# EAGLE board XuLA2-array (EAGLE 5.11), part 1 of 6
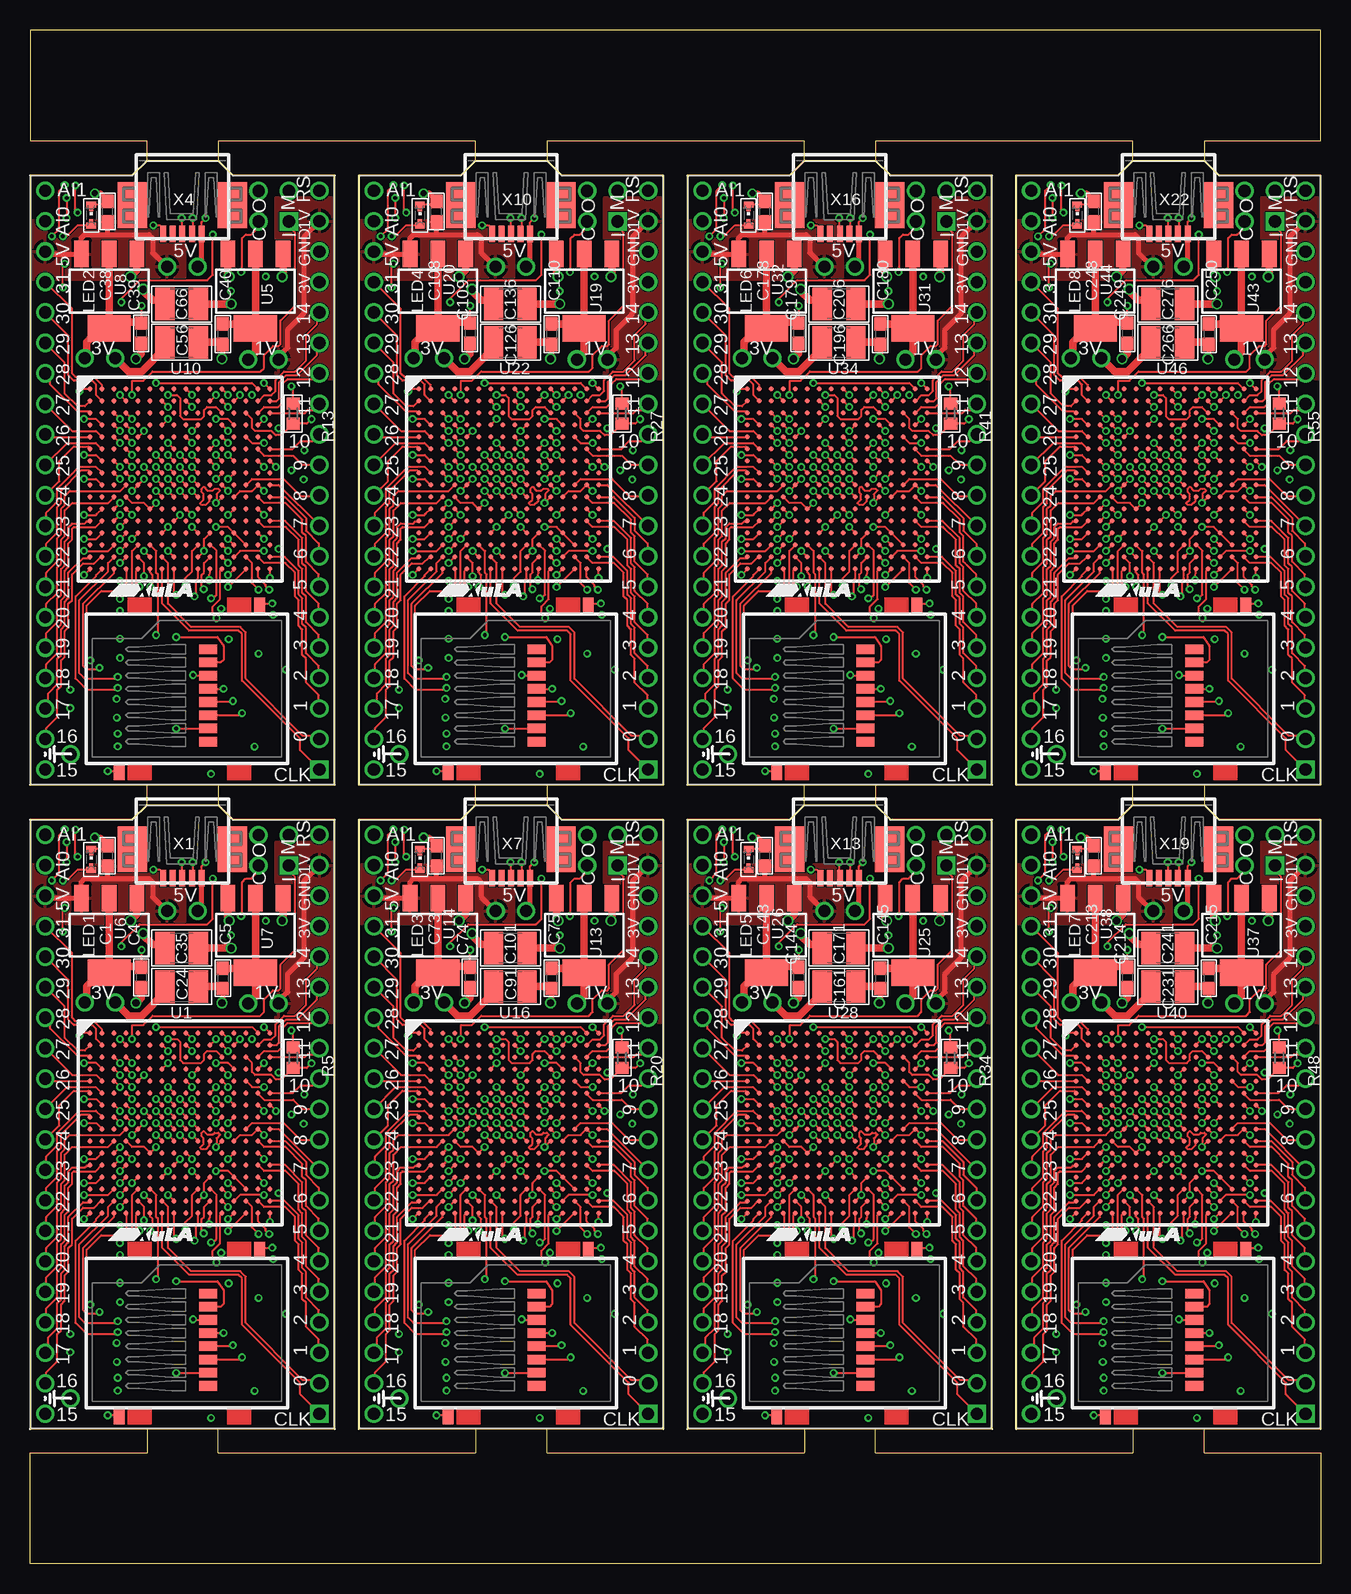
[diagram p0: board, top side]
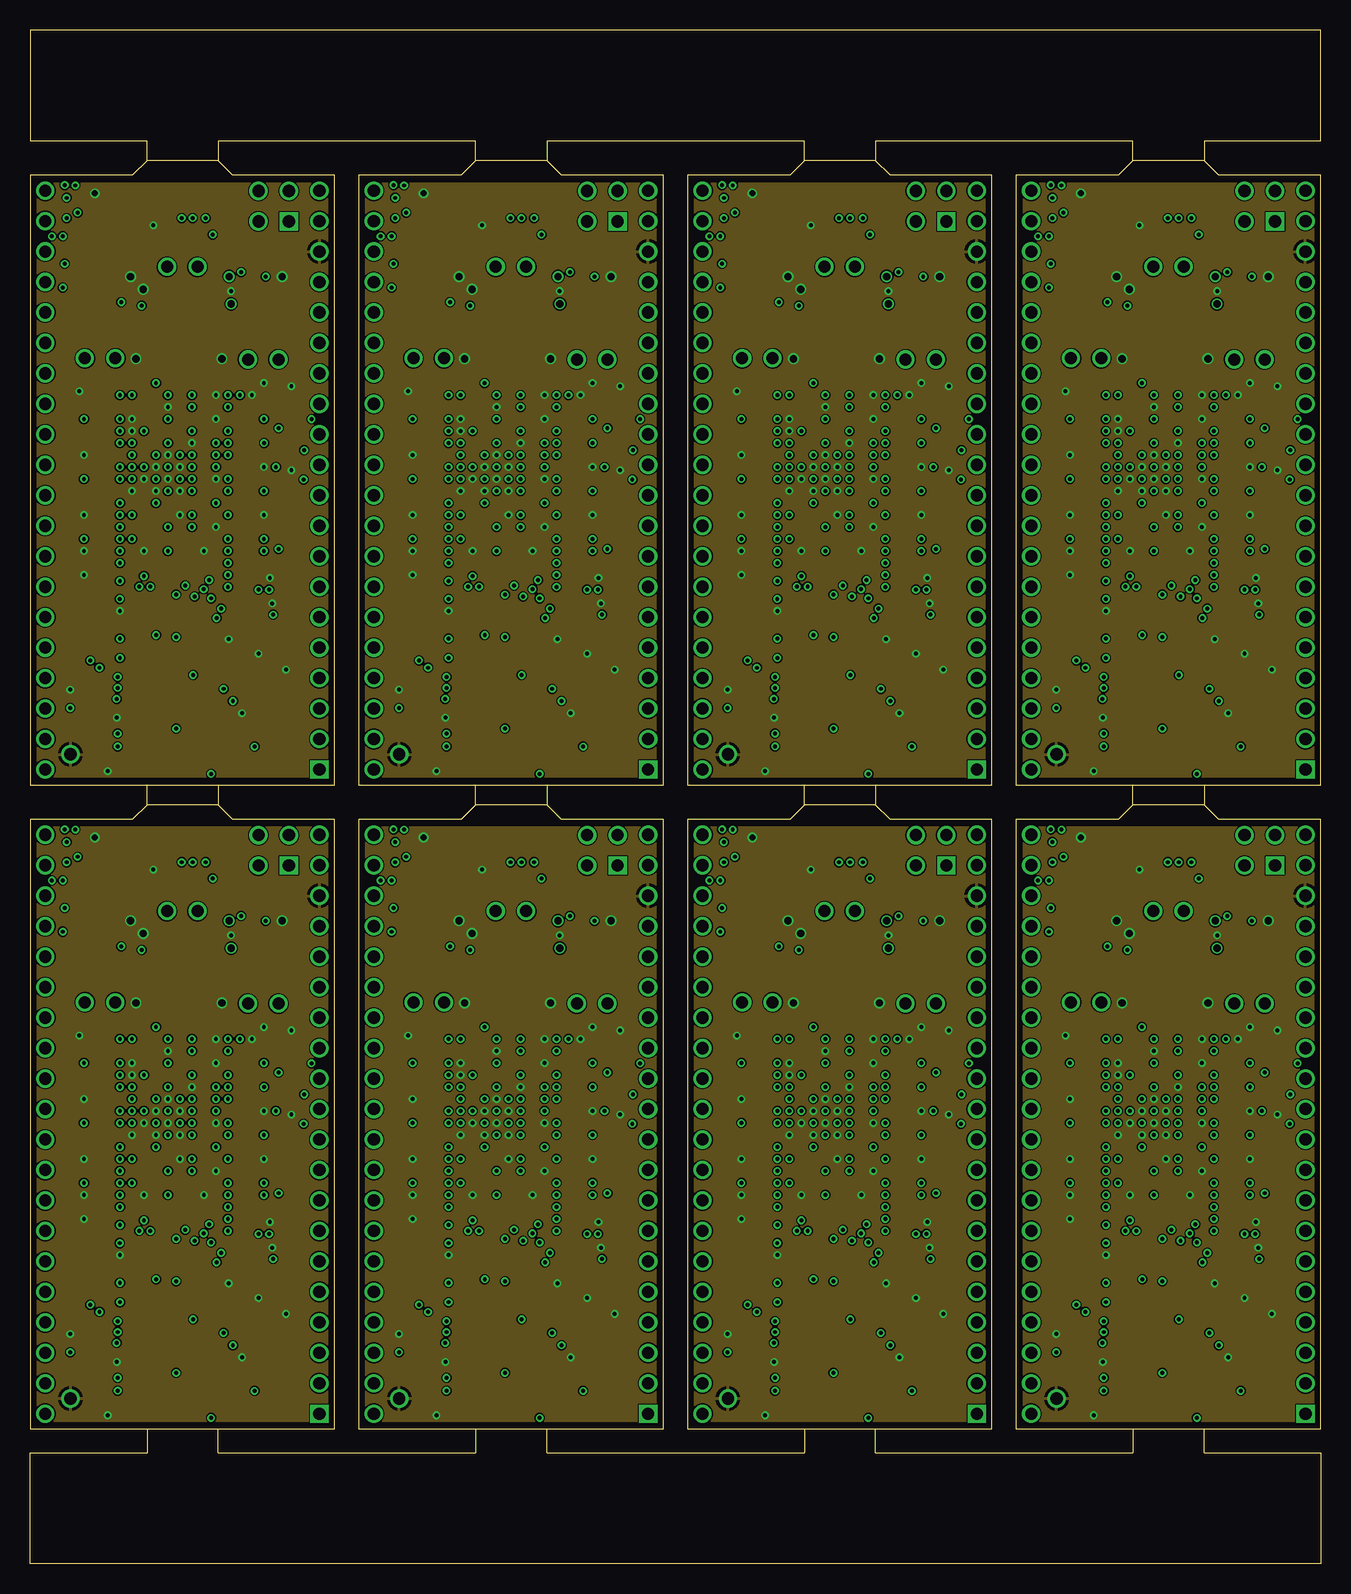
[diagram p1: board, inner layer Route2]
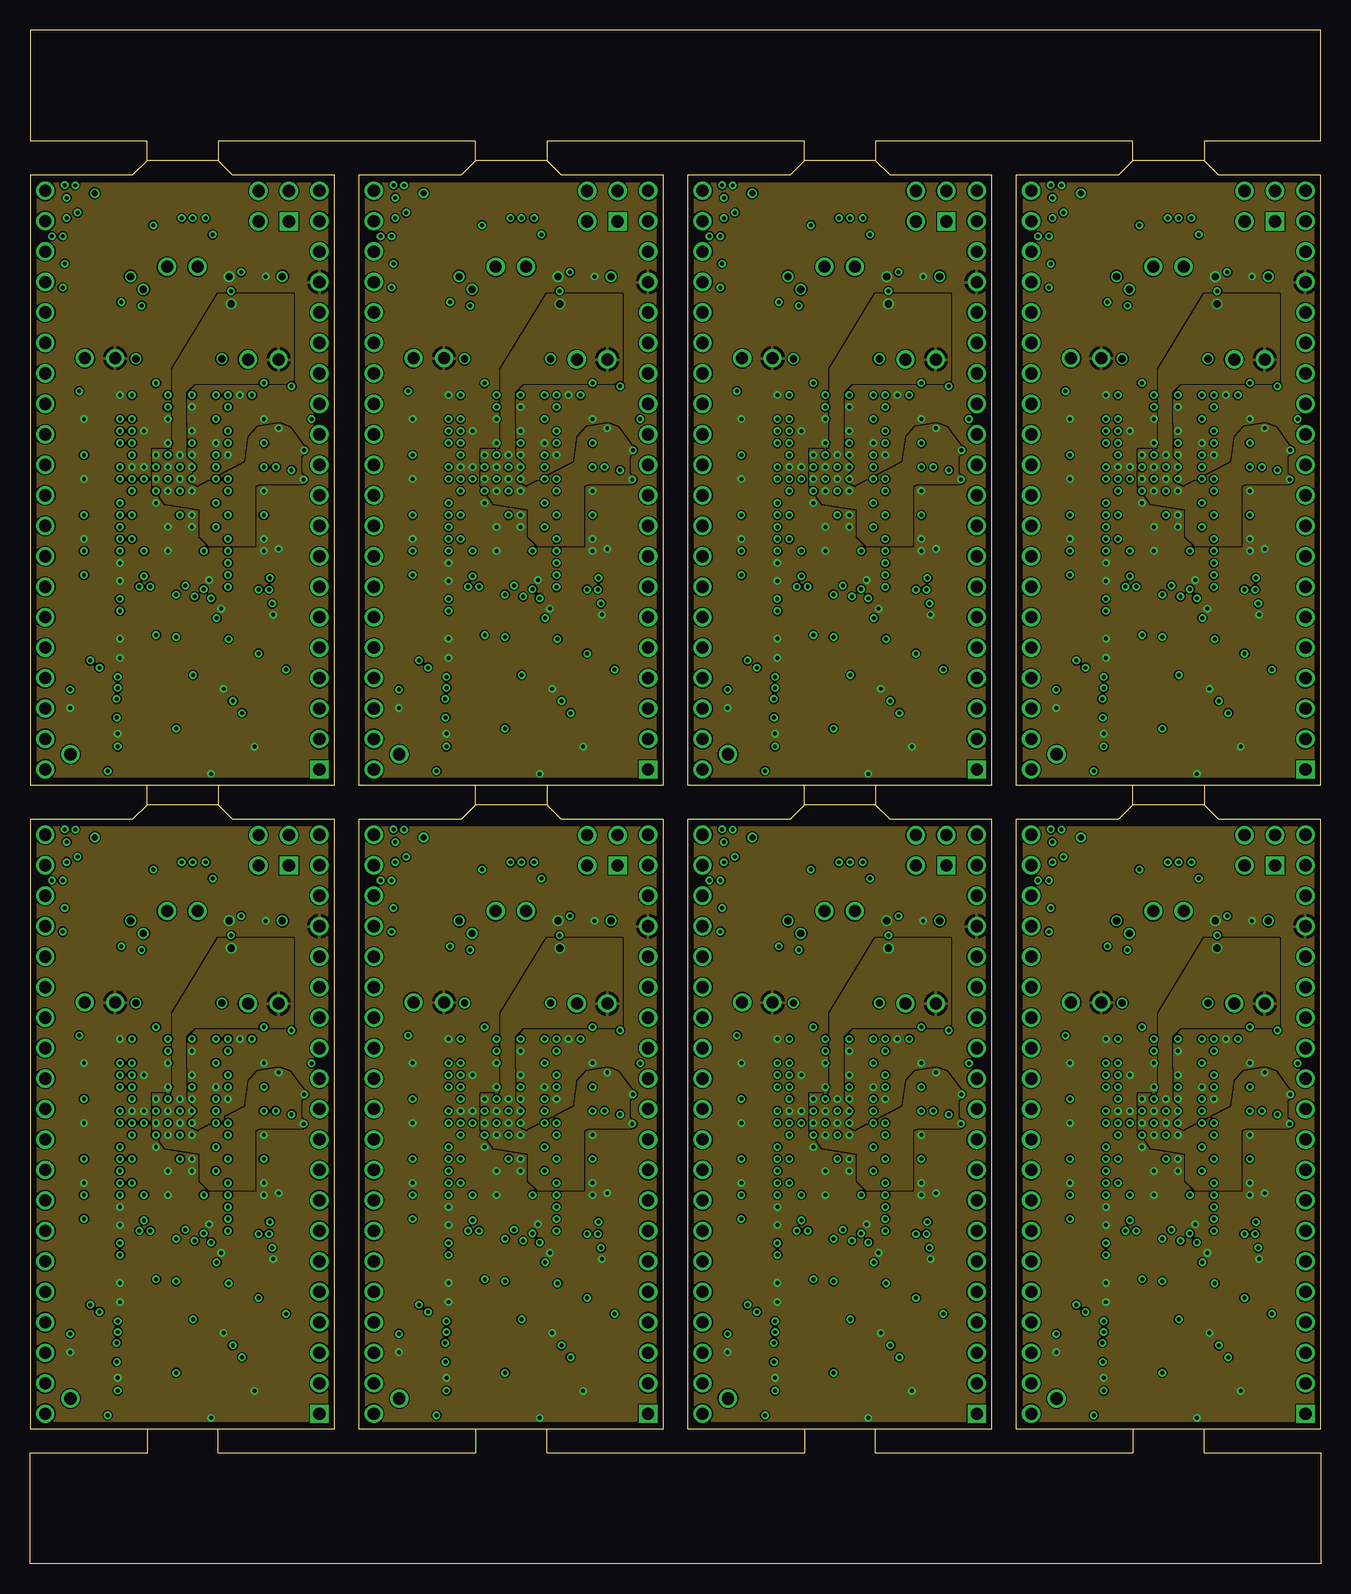
[diagram p2: board, inner layer Route3]
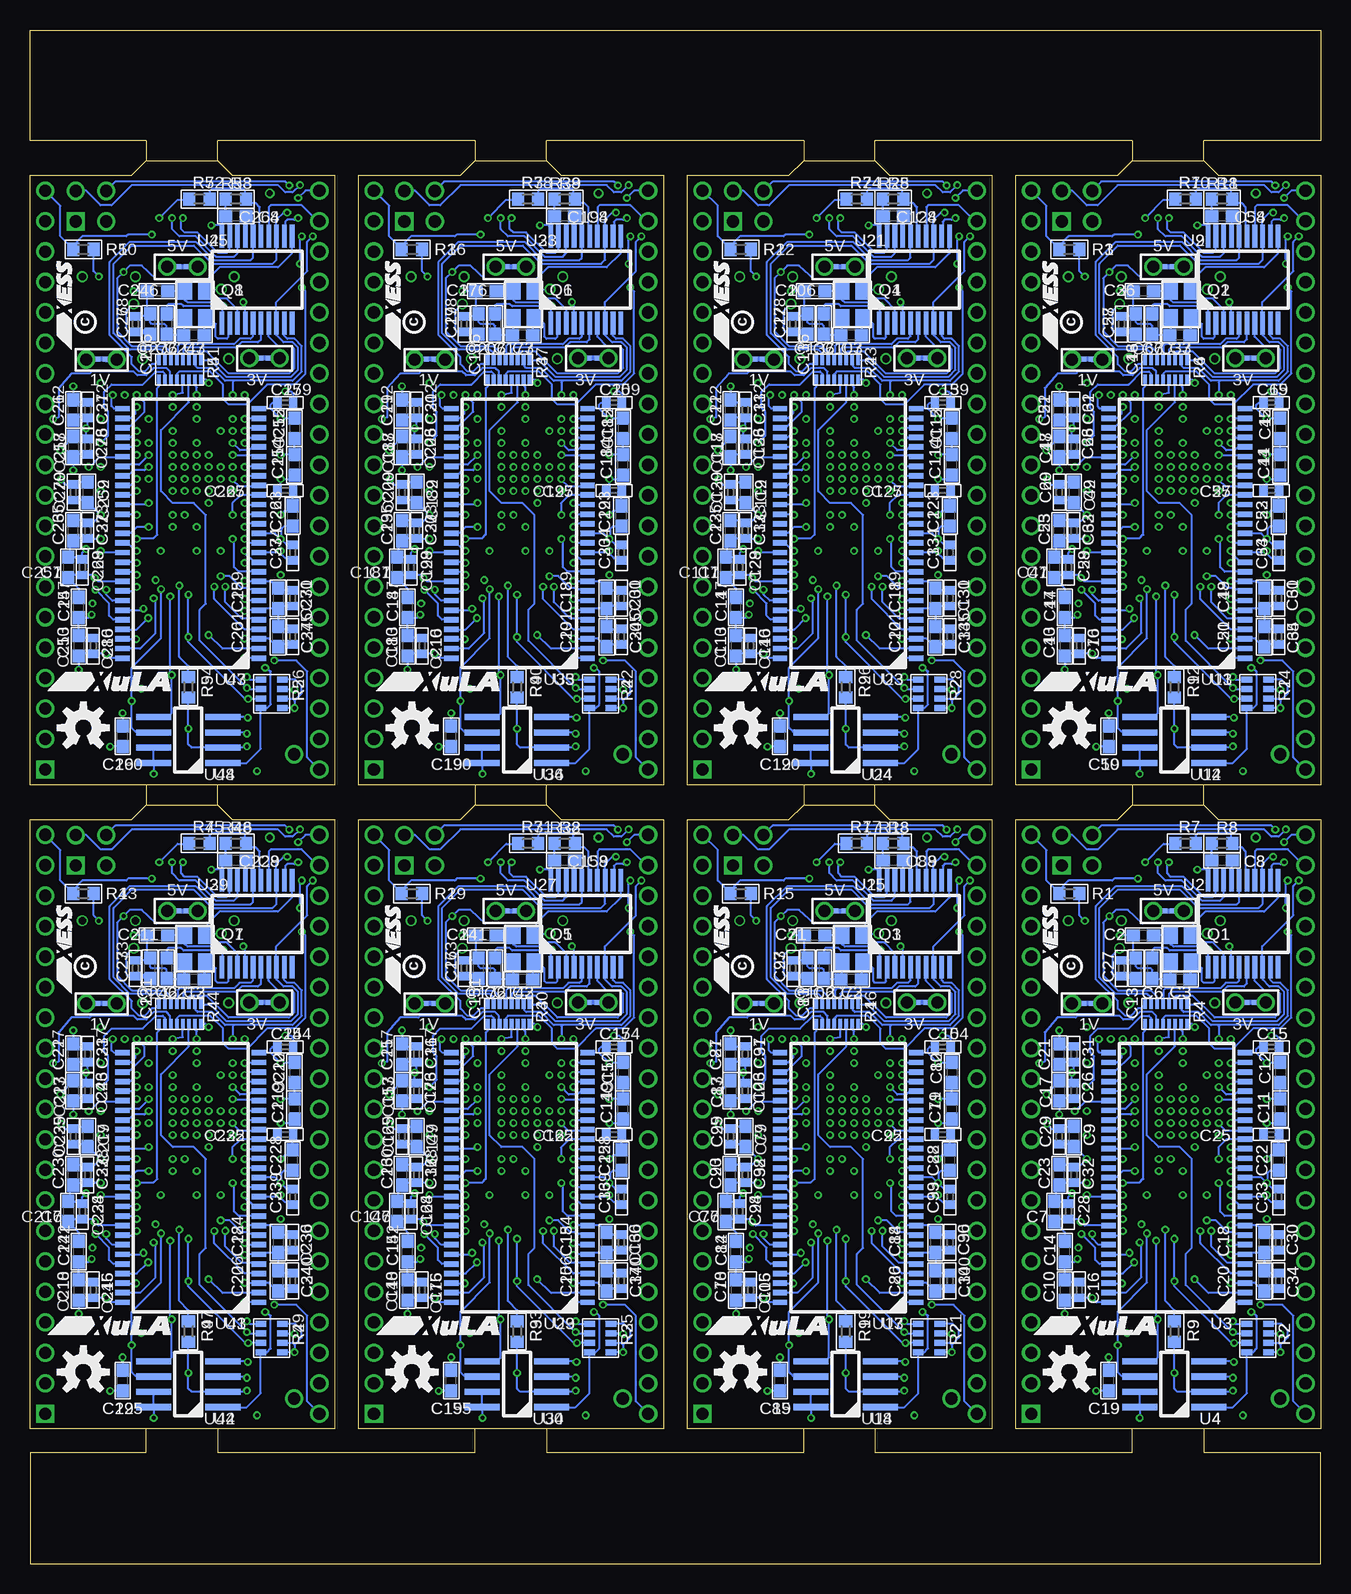
[diagram p3: board, bottom side, seen from below]

Size 107.6 x 127.84 mm. Coordinates in mm from the lower left corner, seen from the top.
Outline: 9.75,11.22 0,11.22 0,62.02 8.53,62.02 9.75,63.24
Outline: 9.75,11.22 15.7,11.22
Outline: 15.7,11.22 25.4,11.22 25.4,62.02 16.92,62.02 15.7,63.24
Outline: 15.7,63.24 9.75,63.24
Outline: 9.75,63.24 9.75,64.92
Outline: 15.7,64.92 15.7,63.24
Outline: 9.75,64.92 0,64.92 0,115.72 8.53,115.72 9.75,116.94
Outline: 9.75,64.92 15.7,64.92
Outline: 15.7,64.92 25.4,64.92 25.4,115.72 16.92,115.72 15.7,116.94
Outline: 15.7,116.94 9.75,116.94
Outline: 9.75,116.94 9.75,118.62 0,118.62 0,127.84 107.6,127.84 107.6,118.62 97.9,118.62 97.9,116.94
Outline: 15.7,116.94 15.7,118.62 37.15,118.62 37.15,116.94
Outline: 9.75,11.22 9.75,9.22 0,9.22 0,0 107.6,0 107.6,9.22 97.9,9.22 97.9,11.22
Outline: 15.7,11.22 15.7,9.22 37.15,9.22 37.15,11.22
Outline: 37.15,11.22 27.4,11.22 27.4,62.02 35.93,62.02 37.15,63.24
Outline: 37.15,11.22 43.1,11.22
Outline: 43.1,11.22 52.8,11.22 52.8,62.02 44.32,62.02 43.1,63.24
Outline: 43.1,63.24 37.15,63.24
Outline: 37.15,63.24 37.15,64.92
Outline: 43.1,64.92 43.1,63.24
Outline: 37.15,64.92 27.4,64.92 27.4,115.72 35.93,115.72 37.15,116.94
Outline: 37.15,64.92 43.1,64.92
Outline: 43.1,64.92 52.8,64.92 52.8,115.72 44.32,115.72 43.1,116.94
Outline: 43.1,116.94 37.15,116.94
Outline: 43.1,116.94 43.1,118.62 64.55,118.62 64.55,116.94
Outline: 43.1,11.22 43.1,9.22 64.55,9.22 64.55,11.22
Outline: 64.55,11.22 54.8,11.22 54.8,62.02 63.33,62.02 64.55,63.24
Outline: 64.55,11.22 70.5,11.22
Outline: 70.5,11.22 80.2,11.22 80.2,62.02 71.72,62.02 70.5,63.24
Outline: 70.5,63.24 64.55,63.24
Outline: 64.55,63.24 64.55,64.92
Outline: 70.5,64.92 70.5,63.24
Outline: 64.55,64.92 54.8,64.92 54.8,115.72 63.33,115.72 64.55,116.94
Outline: 64.55,64.92 70.5,64.92
Outline: 70.5,64.92 80.2,64.92 80.2,115.72 71.72,115.72 70.5,116.94
Outline: 70.5,116.94 64.55,116.94
Outline: 70.5,116.94 70.5,118.62 91.95,118.62 91.95,116.94
Outline: 70.5,11.22 70.5,9.22 91.95,9.22 91.95,11.22
Outline: 91.95,11.22 82.2,11.22 82.2,62.02 90.73,62.02 91.95,63.24
Outline: 91.95,11.22 97.9,11.22
Outline: 97.9,11.22 107.6,11.22 107.6,62.02 99.12,62.02 97.9,63.24
Outline: 97.9,63.24 91.95,63.24
Outline: 91.95,63.24 91.95,64.92
Outline: 97.9,64.92 97.9,63.24
Outline: 91.95,64.92 82.2,64.92 82.2,115.72 90.73,115.72 91.95,116.94
Outline: 91.95,64.92 97.9,64.92
Outline: 97.9,64.92 107.6,64.92 107.6,115.72 99.12,115.72 97.9,116.94
Outline: 97.9,116.94 91.95,116.94
Copper layers (1*2*3*16): Top 0.035mm / dielectric 0.126mm / Route2 0.035mm / dielectric 1.626mm / Route3 0.035mm / dielectric 0.126mm / Bottom 0.035mm
Design rules "SEP_4layer *": minimum track width 5mil, minimum drill 10mil, track to track 0.1mm, track to pad 0.1295mm, pad to pad 0.1mm, via to via 0.1mm, smd to smd 0.1mm, copper to edge 0.15mm, drill to drill 0.2mm, minimum pad ring 10mil, minimum via ring 6mil, stop-mask expansion 2mil, vias tented up to drill 0.6071mm, thermal gap 10mil
Net classes: 1 power: clearance 0.254 mm

## Footprints (pad centres in the part's own frame; a part is rotated, then mirrored left to right if it is on the bottom)
JP1-NOSILK = drill 1 round: 1 0,-1.27; 2 0,1.27
C0603 = smd 1.1 x 1: 1 -0.85,0; 2 0.85,0
C0402 = smd 0.7 x 0.9: 1 -0.65,0; 2 0.65,0
C1210 = smd 1.6 x 2.7: 1 -1.4,0; 2 1.4,0
TP-MINI = drill 1.016 round: 1 0,0
2X02-NOSILK = drill 1.016 square: 1 -1.27,-1.27 | drill 1.016 round: 2 -1.27,1.27; 3 1.27,-1.27; 4 1.27,1.27
CHIPLED-0603-TTW = smd 0.8 x 0.5: A 0,-0.875; C 0,0.875 | smd 0.35 x 0.35: A@1 0,-0.5; C@1 0,0.5
32X25 = smd 1.2 x 1.4: 1 0,0; 2 0,-2.2; 3 1.7,-2.2; 4 1.7,0
R0603 = smd 1 x 1.1: 1 -0.85,0; 2 0.85,0
742C083 = smd 0.5 x 0.9: 1 -0.4,-0.9; 2 0.4,-0.9; 3 1.2,-0.9; 4 2,-0.9; 5 2,0.9; 6 1.2,0.9; 7 0.4,0.9; 8 -0.4,0.9
741X163 = smd 0.3 x 0.8: 1 -1.75,-0.8; 2 -1.25,-0.8; 3 -0.75,-0.8; 4 -0.25,-0.8; 5 0.25,-0.8; 6 0.75,-0.8; 7 1.25,-0.8; 8 1.75,-0.8; 9 1.75,0.8; 10 1.25,0.8; 11 0.75,0.8; 12 0.25,0.8; 13 -0.25,0.8; 14 -0.75,0.8; 15 -1.25,0.8; 16 -1.75,0.8
JPSHORTW = smd 0.406 x 0.406: 1 0,0; 2 0.635,0
XILINX-FT256 = smd 0.4 x 0.4: A1 0,0; A2 1,0; A3 2,0; A4 3,0; A5 4,0; A6 5,0; A7 6,0; A8 7,0; A9 8,0; A10 9,0; A11 10,0; A12 11,0; A13 12,0; A14 13,0; A15 14,0; A16 15,0; B1 0,-1; B2 1,-1; B3 2,-1; B4 3,-1; B5 4,-1; B6 5,-1; B7 6,-1; B8 7,-1; B9 8,-1; B10 9,-1; B11 10,-1; B12 11,-1; B13 12,-1; B14 13,-1; B15 14,-1; B16 15,-1; C1 0,-2; C2 1,-2; C3 2,-2; C4 3,-2; C5 4,-2; C6 5,-2; C7 6,-2; C8 7,-2; C9 8,-2; C10 9,-2; C11 10,-2; C12 11,-2; C13 12,-2; C14 13,-2; C15 14,-2; C16 15,-2; D1 0,-3; D2 1,-3; D3 2,-3; D4 3,-3; D5 4,-3; D6 5,-3; D7 6,-3; D8 7,-3; D9 8,-3; D10 9,-3; D11 10,-3; D12 11,-3; D13 12,-3; D14 13,-3; D15 14,-3; D16 15,-3; E1 0,-4; E2 1,-4; E3 2,-4; E4 3,-4; E5 4,-4; E6 5,-4; E7 6,-4; E8 7,-4; E9 8,-4; E10 9,-4; E11 10,-4; E12 11,-4; E13 12,-4; E14 13,-4; E15 14,-4; E16 15,-4; F1 0,-5; F2 1,-5; F3 2,-5; F4 3,-5; F5 4,-5; F6 5,-5; F7 6,-5; F8 7,-5; F9 8,-5; F10 9,-5; F11 10,-5; F12 11,-5; F13 12,-5; F14 13,-5; F15 14,-5; F16 15,-5; G1 0,-6; G2 1,-6; G3 2,-6; G4 3,-6; G5 4,-6; G6 5,-6; G7 6,-6; G8 7,-6; G9 8,-6; G10 9,-6; G11 10,-6; G12 11,-6; G13 12,-6; G14 13,-6; G15 14,-6; G16 15,-6; H1 0,-7; H2 1,-7; H3 2,-7; H4 3,-7; H5 4,-7; H6 5,-7; H7 6,-7; H8 7,-7; H9 8,-7; H10 9,-7; H11 10,-7; H12 11,-7; H13 12,-7; H14 13,-7; H15 14,-7; H16 15,-7; J1 0,-8; J2 1,-8; J3 2,-8; J4 3,-8; J5 4,-8; J6 5,-8; J7 6,-8; J8 7,-8; J9 8,-8; J10 9,-8; J11 10,-8; J12 11,-8; J13 12,-8; J14 13,-8; J15 14,-8; J16 15,-8; K1 0,-9; K2 1,-9; K3 2,-9; K4 3,-9; K5 4,-9; K6 5,-9; K7 6,-9; K8 7,-9; K9 8,-9; K10 9,-9; K11 10,-9; K12 11,-9; K13 12,-9; K14 13,-9; K15 14,-9; K16 15,-9; L1 0,-10; L2 1,-10; L3 2,-10; L4 3,-10; L5 4,-10; L6 5,-10; L7 6,-10; L8 7,-10; L9 8,-10; L10 9,-10; L11 10,-10; L12 11,-10; L13 12,-10; L14 13,-10; L15 14,-10; L16 15,-10; M1 0,-11; M2 1,-11; M3 2,-11; M4 3,-11; M5 4,-11; M6 5,-11; M7 6,-11; M8 7,-11; M9 8,-11; M10 9,-11; M11 10,-11; M12 11,-11; M13 12,-11; M14 13,-11; M15 14,-11; M16 15,-11; N1 0,-12; N2 1,-12; N3 2,-12; N4 3,-12; N5 4,-12; N6 5,-12; N7 6,-12; N8 7,-12; N9 8,-12; N10 9,-12; N11 10,-12; N12 11,-12; N13 12,-12; N14 13,-12; N15 14,-12; N16 15,-12; P1 0,-13; P2 1,-13; P3 2,-13; P4 3,-13; P5 4,-13; P6 5,-13; P7 6,-13; P8 7,-13; P9 8,-13; P10 9,-13; P11 10,-13; P12 11,-13; P13 12,-13; P14 13,-13; P15 14,-13; P16 15,-13; R1 0,-14; R2 1,-14; R3 2,-14; R4 3,-14; R5 4,-14; R6 5,-14; R7 6,-14; R8 7,-14; R9 8,-14; R10 9,-14; R11 10,-14; R12 11,-14; R13 12,-14; R14 13,-14; R15 14,-14; R16 15,-14; T1 0,-15; T2 1,-15; T3 2,-15; T4 3,-15; T5 4,-15; T6 5,-15; T7 6,-15; T8 7,-15; T9 8,-15; T10 9,-15; T11 10,-15; T12 11,-15; T13 12,-15; T14 13,-15; T15 14,-15; T16 15,-15
MICROCHIP-20_SSOP = smd 1.89 x 0.38: 1 0,0; 2 0,-0.65; 3 0,-1.3; 4 0,-1.95; 5 0,-2.6; 6 0,-3.25; 7 0,-3.9; 8 0,-4.55; 9 0,-5.2; 10 0,-5.85; 11 7.25,-5.85; 12 7.25,-5.2; 13 7.25,-4.55; 14 7.25,-3.9; 15 7.25,-3.25; 16 7.25,-2.6; 17 7.25,-1.95; 18 7.25,-1.3; 19 7.25,-0.65; 20 7.25,0
TSOPII-54 = smd 1.2 x 0.45: 1 0,0; 2 0,-0.8; 3 0,-1.6; 4 0,-2.4; 5 0,-3.2; 6 0,-4; 7 0,-4.8; 8 0,-5.6; 9 0,-6.4; 10 0,-7.2; 11 0,-8; 12 0,-8.8; 13 0,-9.6; 14 0,-10.4; 15 0,-11.2; 16 0,-12; 17 0,-12.8; 18 0,-13.6; 19 0,-14.4; 20 0,-15.2; 21 0,-16; 22 0,-16.8; 23 0,-17.6; 24 0,-18.4; 25 0,-19.2; 26 0,-20; 27 0,-20.8; 28 11.36,-20.8; 29 11.36,-20; 30 11.36,-19.2; 31 11.36,-18.4; 32 11.36,-17.6; 33 11.36,-16.8; 34 11.36,-16; 35 11.36,-15.2; 36 11.36,-14.4; 37 11.36,-13.6; 38 11.36,-12.8; 39 11.36,-12; 40 11.36,-11.2; 41 11.36,-10.4; 42 11.36,-9.6; 43 11.36,-8.8; 44 11.36,-8; 45 11.36,-7.2; 46 11.36,-6.4; 47 11.36,-5.6; 48 11.36,-4.8; 49 11.36,-4; 50 11.36,-3.2; 51 11.36,-2.4; 52 11.36,-1.6; 53 11.36,-0.8; 54 11.36,0
SPI-8_SOIC_150_208 = smd 2.921 x 0.51: 1 1.06,0; 2 1.06,-1.27; 3 1.06,-2.54; 4 1.06,-3.81; 5 6.839,-3.81; 6 6.839,-2.54; 7 6.839,-1.27; 8 6.839,0
SOT223 = smd 1.219 x 2.235: 1 -2.311,-3.099; 2 0,-3.099; 3 2.311,-3.099 | smd 3.6 x 2.2: 4 0,3.099
UX60SC-MB-5ST = smd 1.4 x 0.5: 1 6.1,1.6; 2 6.1,0.8; 3 6.1,0; 4 6.1,-0.8; 5 6.1,-1.6 | smd 3.8 x 2.449: M1 3.7,-4.175; M2 3.7,4.175
XULA-DIP40 = drill 1.016 square: 1 49.53,24.13 | drill 1.016 round: 2 46.99,24.13; 3 44.45,24.13; 4 41.91,24.13; 5 39.37,24.13; 6 36.83,24.13; 7 34.29,24.13; 8 31.75,24.13; 9 29.21,24.13; 10 26.67,24.13; 11 24.13,24.13; 12 21.59,24.13; 13 19.05,24.13; 14 16.51,24.13; 15 13.97,24.13; 16 11.43,24.13; 17 8.89,24.13; 18 6.35,24.13; 19 3.81,24.13; 20 1.27,24.13; 21 49.53,1.27; 22 46.99,1.27; 23 44.45,1.27; 24 41.91,1.27; 25 39.37,1.27; 26 36.83,1.27; 27 34.29,1.27; 28 31.75,1.27; 29 29.21,1.27; 30 26.67,1.27; 31 24.13,1.27; 32 21.59,1.27; 33 19.05,1.27; 34 16.51,1.27; 35 13.97,1.27; 36 11.43,1.27; 37 8.89,1.27; 38 6.35,1.27; 39 3.81,1.27; 40 1.27,1.27
SCHD3A0100 = smd 0.8 x 1.5: 1 3.3,-10.15; 2 2.2,-10.15; 3 1.1,-10.15; 4 0,-10.15; 5 -1.1,-10.15; 6 -2.2,-10.15; 7 -3.3,-10.15; 8 -4.4,-10.15 | smd 1.45 x 0.9: G1 6.875,-14.45; G2 -6.875,-2.75

## Placement (x,y rotation side)
1.2V  [JP1-NOSILK]  19.46,46.68 270 top
1.2V1  [JP1-NOSILK]  19.46,100.38 270 top
1.2V2  [JP1-NOSILK]  46.86,46.68 270 top
1.2V3  [JP1-NOSILK]  46.86,100.38 270 top
1.2V4  [JP1-NOSILK]  74.26,46.68 270 top
1.2V5  [JP1-NOSILK]  74.26,100.38 270 top
1.2V6  [JP1-NOSILK]  101.66,46.68 270 top
1.2V7  [JP1-NOSILK]  101.66,100.38 270 top
3.3V  [JP1-NOSILK]  5.84,46.78 270 top
3.3V1  [JP1-NOSILK]  5.84,100.48 270 top
3.3V2  [JP1-NOSILK]  33.24,46.78 270 top
3.3V3  [JP1-NOSILK]  33.24,100.48 270 top
3.3V4  [JP1-NOSILK]  60.64,46.78 270 top
3.3V5  [JP1-NOSILK]  60.64,100.48 270 top
3.3V6  [JP1-NOSILK]  88.04,46.78 270 top
3.3V7  [JP1-NOSILK]  88.04,100.48 270 top
5V  [JP1-NOSILK]  12.7,54.4 90 top
5V1  [JP1-NOSILK]  12.7,108.1 90 top
5V2  [JP1-NOSILK]  40.1,54.4 90 top
5V3  [JP1-NOSILK]  40.1,108.1 90 top
5V4  [JP1-NOSILK]  67.5,54.4 90 top
5V5  [JP1-NOSILK]  67.5,108.1 90 top
5V6  [JP1-NOSILK]  94.9,54.4 90 top
5V7  [JP1-NOSILK]  94.9,108.1 90 top
C1  4.7uF  [C0603]  6.48,59 90 top
C2  10pF  [C0603]  14.78,52.37 180 bottom
C3  10pF  [C0603]  11.73,48.71 180 bottom
C4  4.7uF  [C0603]  9.27,48.86 270 top
C5  4.7uF  [C0603]  16.08,48.79 270 top
C6  0.1uF  [C0603]  14.02,49.62 270 bottom
C7  0.1uF  [C0603]  22.2,29.35 270 bottom
C8  0.47uF  [C0603]  8.23,58.62 180 bottom
C9  0.1uF  [C0603]  20.57,35.6 270 bottom
C10  0.1uF  [C0603]  21.34,22.8 270 bottom
C11  0.1uF  [C0603]  3.35,37.89 90 bottom
C12  0.1uF  [C0603]  3.35,40.94 270 bottom
C13  0.1uF  [C0603]  15.39,49.62 90 bottom
C14  0.1uF  [C0603]  21.34,26 90 bottom
C15  10nF  [C0402]  4.11,43.07 0 bottom
C16  10nF  [C0402]  20.12,22.8 270 bottom
C17  0.1uF  [C0603]  21.79,39.41 270 bottom
C18  0.1uF  [C0603]  4.72,26.76 270 bottom
C19  0.1uF  [C0603]  17.68,15.26 90 bottom
C20  0.1uF  [C0603]  4.72,23.56 90 bottom
C21  0.1uF  [C0603]  21.79,42.46 90 bottom
C22  0.1uF  [C0603]  3.51,33.62 90 bottom
C23  0.1uF  [C0603]  21.79,32.4 90 bottom
C24  22uF  [C1210]  12.65,48.1 0 top
C25  10nF  [C0402]  4.11,35.76 0 bottom
C26  10nF  [C0402]  20.57,39.41 270 bottom
C27  10nF  [C0402]  16.61,49.62 90 bottom
C28  10nF  [C0402]  21.03,29.35 270 bottom
C29  10nF  [C0402]  21.79,35.6 270 bottom
C30  10nF  [C0402]  3.51,26.76 270 bottom
C31  10nF  [C0402]  20.57,42.46 90 bottom
C32  10nF  [C0402]  20.57,32.4 90 bottom
C33  10nF  [C0402]  3.51,30.57 270 bottom
C34  10nF  [C0402]  3.51,23.56 90 bottom
C35  22uF  [C1210]  12.65,51.3 180 top
C36  10pF  [C0603]  14.78,106.07 180 bottom
C37  10pF  [C0603]  11.73,102.41 180 bottom
C38  4.7uF  [C0603]  6.48,112.7 90 top
C39  4.7uF  [C0603]  9.27,102.56 270 top
C40  4.7uF  [C0603]  16.08,102.49 270 top
C41  0.1uF  [C0603]  22.2,83.05 270 bottom
C42  0.1uF  [C0603]  20.57,89.3 270 bottom
C43  0.1uF  [C0603]  21.34,76.5 270 bottom
C44  0.1uF  [C0603]  3.35,91.59 90 bottom
C45  0.1uF  [C0603]  3.35,94.64 270 bottom
C46  0.1uF  [C0603]  15.39,103.32 90 bottom
C47  0.1uF  [C0603]  21.34,79.7 90 bottom
C48  0.1uF  [C0603]  21.79,93.11 270 bottom
C49  0.1uF  [C0603]  4.72,80.46 270 bottom
C50  0.1uF  [C0603]  17.68,68.96 90 bottom
C51  0.1uF  [C0603]  4.72,77.26 90 bottom
C52  0.1uF  [C0603]  21.79,96.16 90 bottom
C53  0.1uF  [C0603]  3.51,87.32 90 bottom
C54  0.47uF  [C0603]  8.23,112.32 180 bottom
C55  0.1uF  [C0603]  21.79,86.1 90 bottom
C56  22uF  [C1210]  12.65,101.8 0 top
C57  10nF  [C0402]  4.11,89.46 0 bottom
C58  10nF  [C0402]  16.61,103.32 90 bottom
C59  10nF  [C0402]  21.03,83.05 270 bottom
C60  10nF  [C0402]  21.79,89.3 270 bottom
C61  10nF  [C0402]  3.51,80.46 270 bottom
C62  10nF  [C0402]  20.57,96.16 90 bottom
C63  10nF  [C0402]  20.57,86.1 90 bottom
C64  10nF  [C0402]  3.51,84.27 270 bottom
C65  10nF  [C0402]  3.51,77.26 90 bottom
C66  22uF  [C1210]  12.65,105 180 top
C67  0.1uF  [C0603]  14.02,103.32 270 bottom
C68  10nF  [C0402]  20.57,93.11 270 bottom
C69  10nF  [C0402]  4.11,96.77 0 bottom
C70  10nF  [C0402]  20.12,76.5 270 bottom
C71  10pF  [C0603]  42.18,52.37 180 bottom
C72  10pF  [C0603]  39.13,48.71 180 bottom
C73  4.7uF  [C0603]  33.88,59 90 top
C74  4.7uF  [C0603]  36.67,48.86 270 top
C75  4.7uF  [C0603]  43.48,48.79 270 top
C76  0.1uF  [C0603]  49.6,29.35 270 bottom
C77  0.1uF  [C0603]  47.97,35.6 270 bottom
C78  0.1uF  [C0603]  48.74,22.8 270 bottom
C79  0.1uF  [C0603]  30.75,37.89 90 bottom
C80  0.1uF  [C0603]  30.75,40.94 270 bottom
C81  0.1uF  [C0603]  42.79,49.62 90 bottom
C82  0.1uF  [C0603]  48.74,26 90 bottom
C83  0.1uF  [C0603]  49.19,39.41 270 bottom
C84  0.1uF  [C0603]  32.12,26.76 270 bottom
C85  0.1uF  [C0603]  45.08,15.26 90 bottom
C86  0.1uF  [C0603]  32.12,23.56 90 bottom
C87  0.1uF  [C0603]  49.19,42.46 90 bottom
C88  0.1uF  [C0603]  30.91,33.62 90 bottom
C89  0.47uF  [C0603]  35.63,58.62 180 bottom
C90  0.1uF  [C0603]  49.19,32.4 90 bottom
C91  22uF  [C1210]  40.05,48.1 0 top
C92  10nF  [C0402]  31.51,35.76 0 bottom
C93  10nF  [C0402]  44.01,49.62 90 bottom
C94  10nF  [C0402]  48.43,29.35 270 bottom
C95  10nF  [C0402]  49.19,35.6 270 bottom
C96  10nF  [C0402]  30.91,26.76 270 bottom
C97  10nF  [C0402]  47.97,42.46 90 bottom
C98  10nF  [C0402]  47.97,32.4 90 bottom
C99  10nF  [C0402]  30.91,30.57 270 bottom
C100  10nF  [C0402]  30.91,23.56 90 bottom
C101  22uF  [C1210]  40.05,51.3 180 top
C102  0.1uF  [C0603]  41.42,49.62 270 bottom
C103  10nF  [C0402]  47.97,39.41 270 bottom
C104  10nF  [C0402]  31.51,43.07 0 bottom
C105  10nF  [C0402]  47.52,22.8 270 bottom
C106  10pF  [C0603]  42.18,106.07 180 bottom
C107  10pF  [C0603]  39.13,102.41 180 bottom
C108  4.7uF  [C0603]  33.88,112.7 90 top
C109  4.7uF  [C0603]  36.67,102.56 270 top
C110  4.7uF  [C0603]  43.48,102.49 270 top
C111  0.1uF  [C0603]  49.6,83.05 270 bottom
C112  0.1uF  [C0603]  47.97,89.3 270 bottom
C113  0.1uF  [C0603]  48.74,76.5 270 bottom
C114  0.1uF  [C0603]  30.75,91.59 90 bottom
C115  0.1uF  [C0603]  30.75,94.64 270 bottom
C116  0.1uF  [C0603]  42.79,103.32 90 bottom
C117  0.1uF  [C0603]  48.74,79.7 90 bottom
C118  0.1uF  [C0603]  49.19,93.11 270 bottom
C119  0.1uF  [C0603]  32.12,80.46 270 bottom
C120  0.1uF  [C0603]  45.08,68.96 90 bottom
C121  0.1uF  [C0603]  32.12,77.26 90 bottom
C122  0.1uF  [C0603]  49.19,96.16 90 bottom
C123  0.1uF  [C0603]  30.91,87.32 90 bottom
C124  0.47uF  [C0603]  35.63,112.32 180 bottom
C125  0.1uF  [C0603]  49.19,86.1 90 bottom
C126  22uF  [C1210]  40.05,101.8 0 top
C127  10nF  [C0402]  31.51,89.46 0 bottom
C128  10nF  [C0402]  44.01,103.32 90 bottom
C129  10nF  [C0402]  48.43,83.05 270 bottom
C130  10nF  [C0402]  49.19,89.3 270 bottom
C131  10nF  [C0402]  30.91,80.46 270 bottom
C132  10nF  [C0402]  47.97,96.16 90 bottom
C133  10nF  [C0402]  47.97,86.1 90 bottom
C134  10nF  [C0402]  30.91,84.27 270 bottom
C135  10nF  [C0402]  30.91,77.26 90 bottom
C136  22uF  [C1210]  40.05,105 180 top
C137  0.1uF  [C0603]  41.42,103.32 270 bottom
C138  10nF  [C0402]  47.97,93.11 270 bottom
C139  10nF  [C0402]  31.51,96.77 0 bottom
C140  10nF  [C0402]  47.52,76.5 270 bottom
C141  10pF  [C0603]  69.58,52.37 180 bottom
C142  10pF  [C0603]  66.53,48.71 180 bottom
C143  4.7uF  [C0603]  61.28,59 90 top
C144  4.7uF  [C0603]  64.07,48.86 270 top
C145  4.7uF  [C0603]  70.88,48.79 270 top
C146  0.1uF  [C0603]  77,29.35 270 bottom
C147  0.1uF  [C0603]  75.37,35.6 270 bottom
C148  0.1uF  [C0603]  76.14,22.8 270 bottom
C149  0.1uF  [C0603]  58.15,37.89 90 bottom
C150  0.1uF  [C0603]  58.15,40.94 270 bottom
C151  0.1uF  [C0603]  70.19,49.62 90 bottom
C152  0.1uF  [C0603]  76.14,26 90 bottom
C153  0.1uF  [C0603]  76.59,39.41 270 bottom
C154  0.1uF  [C0603]  59.52,26.76 270 bottom
C155  0.1uF  [C0603]  72.48,15.26 90 bottom
C156  0.1uF  [C0603]  59.52,23.56 90 bottom
C157  0.1uF  [C0603]  76.59,42.46 90 bottom
C158  0.1uF  [C0603]  58.31,33.62 90 bottom
C159  0.47uF  [C0603]  63.03,58.62 180 bottom
C160  0.1uF  [C0603]  76.59,32.4 90 bottom
C161  22uF  [C1210]  67.45,48.1 0 top
C162  10nF  [C0402]  58.91,35.76 0 bottom
C163  10nF  [C0402]  71.41,49.62 90 bottom
C164  10nF  [C0402]  75.83,29.35 270 bottom
C165  10nF  [C0402]  76.59,35.6 270 bottom
C166  10nF  [C0402]  58.31,26.76 270 bottom
C167  10nF  [C0402]  75.37,42.46 90 bottom
C168  10nF  [C0402]  75.37,32.4 90 bottom
C169  10nF  [C0402]  58.31,30.57 270 bottom
C170  10nF  [C0402]  58.31,23.56 90 bottom
C171  22uF  [C1210]  67.45,51.3 180 top
C172  0.1uF  [C0603]  68.82,49.62 270 bottom
C173  10nF  [C0402]  75.37,39.41 270 bottom
C174  10nF  [C0402]  58.91,43.07 0 bottom
C175  10nF  [C0402]  74.92,22.8 270 bottom
C176  10pF  [C0603]  69.58,106.07 180 bottom
C177  10pF  [C0603]  66.53,102.41 180 bottom
C178  4.7uF  [C0603]  61.28,112.7 90 top
C179  4.7uF  [C0603]  64.07,102.56 270 top
C180  4.7uF  [C0603]  70.88,102.49 270 top
C181  0.1uF  [C0603]  77,83.05 270 bottom
C182  0.1uF  [C0603]  75.37,89.3 270 bottom
C183  0.1uF  [C0603]  76.14,76.5 270 bottom
C184  0.1uF  [C0603]  58.15,91.59 90 bottom
C185  0.1uF  [C0603]  58.15,94.64 270 bottom
C186  0.1uF  [C0603]  70.19,103.32 90 bottom
C187  0.1uF  [C0603]  76.14,79.7 90 bottom
C188  0.1uF  [C0603]  76.59,93.11 270 bottom
C189  0.1uF  [C0603]  59.52,80.46 270 bottom
C190  0.1uF  [C0603]  72.48,68.96 90 bottom
C191  0.1uF  [C0603]  59.52,77.26 90 bottom
C192  0.1uF  [C0603]  76.59,96.16 90 bottom
C193  0.1uF  [C0603]  58.31,87.32 90 bottom
C194  0.47uF  [C0603]  63.03,112.32 180 bottom
C195  0.1uF  [C0603]  76.59,86.1 90 bottom
C196  22uF  [C1210]  67.45,101.8 0 top
C197  10nF  [C0402]  58.91,89.46 0 bottom
C198  10nF  [C0402]  71.41,103.32 90 bottom
C199  10nF  [C0402]  75.83,83.05 270 bottom
C200  10nF  [C0402]  76.59,89.3 270 bottom
C201  10nF  [C0402]  58.31,80.46 270 bottom
C202  10nF  [C0402]  75.37,96.16 90 bottom
C203  10nF  [C0402]  75.37,86.1 90 bottom
C204  10nF  [C0402]  58.31,84.27 270 bottom
C205  10nF  [C0402]  58.31,77.26 90 bottom
C206  22uF  [C1210]  67.45,105 180 top
C207  0.1uF  [C0603]  68.82,103.32 270 bottom
C208  10nF  [C0402]  75.37,93.11 270 bottom
C209  10nF  [C0402]  58.91,96.77 0 bottom
C210  10nF  [C0402]  74.92,76.5 270 bottom
C211  10pF  [C0603]  96.98,52.37 180 bottom
C212  10pF  [C0603]  93.93,48.71 180 bottom
C213  4.7uF  [C0603]  88.68,59 90 top
C214  4.7uF  [C0603]  91.47,48.86 270 top
C215  4.7uF  [C0603]  98.28,48.79 270 top
C216  0.1uF  [C0603]  104.4,29.35 270 bottom
C217  0.1uF  [C0603]  102.77,35.6 270 bottom
C218  0.1uF  [C0603]  103.54,22.8 270 bottom
C219  0.1uF  [C0603]  85.55,37.89 90 bottom
C220  0.1uF  [C0603]  85.55,40.94 270 bottom
C221  0.1uF  [C0603]  97.59,49.62 90 bottom
C222  0.1uF  [C0603]  103.54,26 90 bottom
C223  0.1uF  [C0603]  103.99,39.41 270 bottom
C224  0.1uF  [C0603]  86.92,26.76 270 bottom
C225  0.1uF  [C0603]  99.88,15.26 90 bottom
C226  0.1uF  [C0603]  86.92,23.56 90 bottom
C227  0.1uF  [C0603]  103.99,42.46 90 bottom
C228  0.1uF  [C0603]  85.71,33.62 90 bottom
C229  0.47uF  [C0603]  90.43,58.62 180 bottom
C230  0.1uF  [C0603]  103.99,32.4 90 bottom
C231  22uF  [C1210]  94.85,48.1 0 top
C232  10nF  [C0402]  86.31,35.76 0 bottom
C233  10nF  [C0402]  98.81,49.62 90 bottom
C234  10nF  [C0402]  103.23,29.35 270 bottom
C235  10nF  [C0402]  103.99,35.6 270 bottom
C236  10nF  [C0402]  85.71,26.76 270 bottom
C237  10nF  [C0402]  102.77,42.46 90 bottom
C238  10nF  [C0402]  102.77,32.4 90 bottom
C239  10nF  [C0402]  85.71,30.57 270 bottom
C240  10nF  [C0402]  85.71,23.56 90 bottom
C241  22uF  [C1210]  94.85,51.3 180 top
C242  0.1uF  [C0603]  96.22,49.62 270 bottom
C243  10nF  [C0402]  102.77,39.41 270 bottom
C244  10nF  [C0402]  86.31,43.07 0 bottom
C245  10nF  [C0402]  102.32,22.8 270 bottom
C246  10pF  [C0603]  96.98,106.07 180 bottom
C247  10pF  [C0603]  93.93,102.41 180 bottom
C248  4.7uF  [C0603]  88.68,112.7 90 top
C249  4.7uF  [C0603]  91.47,102.56 270 top
C250  4.7uF  [C0603]  98.28,102.49 270 top
C251  0.1uF  [C0603]  104.4,83.05 270 bottom
C252  0.1uF  [C0603]  102.77,89.3 270 bottom
C253  0.1uF  [C0603]  103.54,76.5 270 bottom
C254  0.1uF  [C0603]  85.55,91.59 90 bottom
C255  0.1uF  [C0603]  85.55,94.64 270 bottom
C256  0.1uF  [C0603]  97.59,103.32 90 bottom
C257  0.1uF  [C0603]  103.54,79.7 90 bottom
C258  0.1uF  [C0603]  103.99,93.11 270 bottom
C259  0.1uF  [C0603]  86.92,80.46 270 bottom
C260  0.1uF  [C0603]  99.88,68.96 90 bottom
C261  0.1uF  [C0603]  86.92,77.26 90 bottom
C262  0.1uF  [C0603]  103.99,96.16 90 bottom
C263  0.1uF  [C0603]  85.71,87.32 90 bottom
C264  0.47uF  [C0603]  90.43,112.32 180 bottom
C265  0.1uF  [C0603]  103.99,86.1 90 bottom
C266  22uF  [C1210]  94.85,101.8 0 top
C267  10nF  [C0402]  86.31,89.46 0 bottom
C268  10nF  [C0402]  98.81,103.32 90 bottom
C269  10nF  [C0402]  103.23,83.05 270 bottom
C270  10nF  [C0402]  103.99,89.3 270 bottom
C271  10nF  [C0402]  85.71,80.46 270 bottom
C272  10nF  [C0402]  102.77,96.16 90 bottom
C273  10nF  [C0402]  102.77,86.1 90 bottom
C274  10nF  [C0402]  85.71,84.27 270 bottom
C275  10nF  [C0402]  85.71,77.26 90 bottom
C276  22uF  [C1210]  94.85,105 180 top
C277  0.1uF  [C0603]  96.22,103.32 270 bottom
C278  10nF  [C0402]  102.77,93.11 270 bottom
C279  10nF  [C0402]  86.31,96.77 0 bottom
C280  10nF  [C0402]  102.32,76.5 270 bottom
GND  TPTP-MINI  [TP-MINI]  3.38,13.76 0 top
GND1  TPTP-MINI  [TP-MINI]  3.38,67.46 0 top
GND2  TPTP-MINI  [TP-MINI]  30.78,13.76 0 top
GND3  TPTP-MINI  [TP-MINI]  30.78,67.46 0 top
GND4  TPTP-MINI  [TP-MINI]  58.18,13.76 0 top
GND5  TPTP-MINI  [TP-MINI]  58.18,67.46 0 top
GND6  TPTP-MINI  [TP-MINI]  85.58,13.76 0 top
GND7  TPTP-MINI  [TP-MINI]  85.58,67.46 0 top
JP1  [2X02-NOSILK]  20.32,113.15 90 top
JP2  [2X02-NOSILK]  47.72,59.45 90 top
JP3  [2X02-NOSILK]  20.32,59.45 90 top
JP4  [2X02-NOSILK]  47.72,113.15 90 top
JP5  [2X02-NOSILK]  75.12,59.45 90 top
JP6  [2X02-NOSILK]  75.12,113.15 90 top
JP7  [2X02-NOSILK]  102.52,59.45 90 top
JP8  [2X02-NOSILK]  102.52,113.15 90 top
LED1  LED0603  [CHIPLED-0603-TTW]  5.11,58.69 0 top
LED2  LED0603  [CHIPLED-0603-TTW]  5.11,112.39 0 top
LED3  LED0603  [CHIPLED-0603-TTW]  32.51,58.69 0 top
LED4  LED0603  [CHIPLED-0603-TTW]  32.51,112.39 0 top
LED5  LED0603  [CHIPLED-0603-TTW]  59.91,58.69 0 top
LED6  LED0603  [CHIPLED-0603-TTW]  59.91,112.39 0 top
LED7  LED0603  [CHIPLED-0603-TTW]  87.31,58.69 0 top
LED8  LED0603  [CHIPLED-0603-TTW]  87.31,112.39 0 top
Q1  12 MHz  [32X25]  12.5,52.37 0 bottom
Q2  12 MHz  [32X25]  12.5,106.07 0 bottom
Q3  12 MHz  [32X25]  39.9,52.37 0 bottom
Q4  12 MHz  [32X25]  39.9,106.07 0 bottom
Q5  12 MHz  [32X25]  67.3,52.37 0 bottom
Q6  12 MHz  [32X25]  67.3,106.07 0 bottom
Q7  12 MHz  [32X25]  94.7,52.37 0 bottom
Q8  12 MHz  [32X25]  94.7,106.07 0 bottom
R1  5.1K  [R0603]  20.95,55.85 0 bottom
R2  [742C083]  5.26,19.6 270 bottom
R3  5.1K  [R0603]  20.95,109.55 0 bottom
R4  100  [741X163]  12.9,45.81 180 bottom
R5  5.1K  [R0603]  21.95,42.16 270 top
R6  100  [741X163]  12.9,99.51 180 bottom
R7  330K  [R0603]  11.28,60.04 180 bottom
R8  680K  [R0603]  8.23,60.04 180 bottom
R9  100  [R0603]  12.19,19.35 90 bottom
R10  330K  [R0603]  11.28,113.74 180 bottom
R11  680K  [R0603]  8.23,113.74 180 bottom
R12  100  [R0603]  12.19,73.05 90 bottom
R13  5.1K  [R0603]  21.95,95.86 270 top
R14  [742C083]  5.26,73.3 270 bottom
R15  5.1K  [R0603]  48.35,55.85 0 bottom
R16  100  [741X163]  40.3,45.81 180 bottom
R17  330K  [R0603]  38.68,60.04 180 bottom
R18  680K  [R0603]  35.63,60.04 180 bottom
R19  100  [R0603]  39.59,19.35 90 bottom
R20  5.1K  [R0603]  49.35,42.16 270 top
R21  [742C083]  32.66,19.6 270 bottom
R22  5.1K  [R0603]  48.35,109.55 0 bottom
R23  100  [741X163]  40.3,99.51 180 bottom
R24  330K  [R0603]  38.68,113.74 180 bottom
R25  680K  [R0603]  35.63,113.74 180 bottom
R26  100  [R0603]  39.59,73.05 90 bottom
R27  5.1K  [R0603]  49.35,95.86 270 top
R28  [742C083]  32.66,73.3 270 bottom
R29  5.1K  [R0603]  75.75,55.85 0 bottom
R30  100  [741X163]  67.7,45.81 180 bottom
R31  330K  [R0603]  66.08,60.04 180 bottom
R32  680K  [R0603]  63.03,60.04 180 bottom
R33  100  [R0603]  66.99,19.35 90 bottom
R34  5.1K  [R0603]  76.75,42.16 270 top
R35  [742C083]  60.06,19.6 270 bottom
R36  5.1K  [R0603]  75.75,109.55 0 bottom
R37  100  [741X163]  67.7,99.51 180 bottom
R38  330K  [R0603]  66.08,113.74 180 bottom
R39  680K  [R0603]  63.03,113.74 180 bottom
R40  100  [R0603]  66.99,73.05 90 bottom
R41  5.1K  [R0603]  76.75,95.86 270 top
R42  [742C083]  60.06,73.3 270 bottom
R43  5.1K  [R0603]  103.16,55.85 0 bottom
R44  100  [741X163]  95.1,45.81 180 bottom
R45  330K  [R0603]  93.48,60.04 180 bottom
R46  680K  [R0603]  90.43,60.04 180 bottom
R47  100  [R0603]  94.39,19.35 90 bottom
R48  5.1K  [R0603]  104.15,42.16 270 top
R49  [742C083]  87.46,19.6 270 bottom
R50  5.1K  [R0603]  103.16,109.55 0 bottom
R51  100  [741X163]  95.1,99.51 180 bottom
R52  330K  [R0603]  93.48,113.74 180 bottom
R53  680K  [R0603]  90.43,113.74 180 bottom
R54  100  [R0603]  94.39,73.05 90 bottom
R55  5.1K  [R0603]  104.15,95.86 270 top
R56  [742C083]  87.46,73.3 270 bottom
SHRT1  [JPSHORTW]  13,54.4 0 bottom
SHRT2  [JPSHORTW]  5.54,46.78 180 bottom
SHRT3  [JPSHORTW]  19.13,46.7 180 bottom
SHRT4  [JPSHORTW]  5.54,100.48 180 bottom
SHRT5  [JPSHORTW]  19.13,100.4 180 bottom
SHRT6  [JPSHORTW]  13,108.1 0 bottom
SHRT7  [JPSHORTW]  32.94,46.78 180 bottom
SHRT8  [JPSHORTW]  46.53,46.7 180 bottom
SHRT9  [JPSHORTW]  40.4,54.4 0 bottom
SHRT10  [JPSHORTW]  32.94,100.48 180 bottom
SHRT11  [JPSHORTW]  46.53,100.4 180 bottom
SHRT12  [JPSHORTW]  40.4,108.1 0 bottom
SHRT13  [JPSHORTW]  60.34,46.78 180 bottom
SHRT14  [JPSHORTW]  73.93,46.7 180 bottom
SHRT15  [JPSHORTW]  67.8,54.4 0 bottom
SHRT16  [JPSHORTW]  60.34,100.48 180 bottom
SHRT17  [JPSHORTW]  73.93,100.4 180 bottom
SHRT18  [JPSHORTW]  67.8,108.1 0 bottom
SHRT19  [JPSHORTW]  87.74,46.78 180 bottom
SHRT20  [JPSHORTW]  101.33,46.7 180 bottom
SHRT21  [JPSHORTW]  95.2,54.4 0 bottom
SHRT22  [JPSHORTW]  87.74,100.48 180 bottom
SHRT23  [JPSHORTW]  101.33,100.4 180 bottom
SHRT24  [JPSHORTW]  95.2,108.1 0 bottom
U1  XC6SLX25-FT256  [XILINX-FT256]  5,44.22 0 top
U2  PIC 18F14K50 uC  [MICROCHIP-20_SSOP]  9.4,49.7 90 bottom
U3  SDRAM-16MX16-WINBOND  [TSOPII-54]  6.32,21.77 180 bottom
U4  SPI_FLASH-SOIC_150_208  [SPI-8_SOIC_150_208]  8.26,13.05 180 bottom
U5  +1.2V Reg.  [SOT223]  18.8,106.07 180 top
U6  +3.3V Reg.  [SOT223]  6.6,52.37 180 top
U7  +1.2V Reg.  [SOT223]  18.8,52.37 180 top
U8  +3.3V Reg.  [SOT223]  6.6,106.07 180 top
U9  PIC 18F14K50 uC  [MICROCHIP-20_SSOP]  9.4,103.4 90 bottom
U10  XC6SLX25-FT256  [XILINX-FT256]  5,97.92 0 top
U11  SDRAM-16MX16-WINBOND  [TSOPII-54]  6.32,75.47 180 bottom
U12  SPI_FLASH-SOIC_150_208  [SPI-8_SOIC_150_208]  8.26,66.75 180 bottom
U13  +1.2V Reg.  [SOT223]  46.2,52.37 180 top
U14  +3.3V Reg.  [SOT223]  34,52.37 180 top
U15  PIC 18F14K50 uC  [MICROCHIP-20_SSOP]  36.8,49.7 90 bottom
U16  XC6SLX25-FT256  [XILINX-FT256]  32.4,44.22 0 top
U17  SDRAM-16MX16-WINBOND  [TSOPII-54]  33.72,21.77 180 bottom
U18  SPI_FLASH-SOIC_150_208  [SPI-8_SOIC_150_208]  35.66,13.05 180 bottom
U19  +1.2V Reg.  [SOT223]  46.2,106.07 180 top
U20  +3.3V Reg.  [SOT223]  34,106.07 180 top
U21  PIC 18F14K50 uC  [MICROCHIP-20_SSOP]  36.8,103.4 90 bottom
U22  XC6SLX25-FT256  [XILINX-FT256]  32.4,97.92 0 top
U23  SDRAM-16MX16-WINBOND  [TSOPII-54]  33.72,75.47 180 bottom
U24  SPI_FLASH-SOIC_150_208  [SPI-8_SOIC_150_208]  35.66,66.75 180 bottom
U25  +1.2V Reg.  [SOT223]  73.6,52.37 180 top
U26  +3.3V Reg.  [SOT223]  61.4,52.37 180 top
U27  PIC 18F14K50 uC  [MICROCHIP-20_SSOP]  64.2,49.7 90 bottom
U28  XC6SLX25-FT256  [XILINX-FT256]  59.8,44.22 0 top
U29  SDRAM-16MX16-WINBOND  [TSOPII-54]  61.12,21.77 180 bottom
U30  SPI_FLASH-SOIC_150_208  [SPI-8_SOIC_150_208]  63.05,13.05 180 bottom
U31  +1.2V Reg.  [SOT223]  73.6,106.07 180 top
U32  +3.3V Reg.  [SOT223]  61.4,106.07 180 top
U33  PIC 18F14K50 uC  [MICROCHIP-20_SSOP]  64.2,103.4 90 bottom
U34  XC6SLX25-FT256  [XILINX-FT256]  59.8,97.92 0 top
U35  SDRAM-16MX16-WINBOND  [TSOPII-54]  61.12,75.47 180 bottom
U36  SPI_FLASH-SOIC_150_208  [SPI-8_SOIC_150_208]  63.05,66.75 180 bottom
U37  +1.2V Reg.  [SOT223]  101,52.37 180 top
U38  +3.3V Reg.  [SOT223]  88.8,52.37 180 top
U39  PIC 18F14K50 uC  [MICROCHIP-20_SSOP]  91.6,49.7 90 bottom
U40  XC6SLX25-FT256  [XILINX-FT256]  87.2,44.22 0 top
U41  SDRAM-16MX16-WINBOND  [TSOPII-54]  88.52,21.77 180 bottom
U42  SPI_FLASH-SOIC_150_208  [SPI-8_SOIC_150_208]  90.45,13.05 180 bottom
U43  +1.2V Reg.  [SOT223]  101,106.07 180 top
U44  +3.3V Reg.  [SOT223]  88.8,106.07 180 top
U45  PIC 18F14K50 uC  [MICROCHIP-20_SSOP]  91.6,103.4 90 bottom
U46  XC6SLX25-FT256  [XILINX-FT256]  87.2,97.92 0 top
U47  SDRAM-16MX16-WINBOND  [TSOPII-54]  88.52,75.47 180 bottom
U48  SPI_FLASH-SOIC_150_208  [SPI-8_SOIC_150_208]  90.45,66.75 180 bottom
X1  MINI-USB-UX60SC-MB-5STUX60SC-MB-5ST  [UX60SC-MB-5ST]  12.7,63.24 270 top
X2  XULA-CONN  [XULA-DIP40]  0,62.02 270 top
X3  MICROSD_CON  [SCHD3A0100]  4.7,19.22 90 top
X4  MINI-USB-UX60SC-MB-5STUX60SC-MB-5ST  [UX60SC-MB-5ST]  12.7,116.94 270 top
X5  XULA-CONN  [XULA-DIP40]  0,115.72 270 top
X6  MICROSD_CON  [SCHD3A0100]  4.7,72.92 90 top
X7  MINI-USB-UX60SC-MB-5STUX60SC-MB-5ST  [UX60SC-MB-5ST]  40.1,63.24 270 top
X8  XULA-CONN  [XULA-DIP40]  27.4,62.02 270 top
X9  MICROSD_CON  [SCHD3A0100]  32.1,19.22 90 top
X10  MINI-USB-UX60SC-MB-5STUX60SC-MB-5ST  [UX60SC-MB-5ST]  40.1,116.94 270 top
X11  XULA-CONN  [XULA-DIP40]  27.4,115.72 270 top
X12  MICROSD_CON  [SCHD3A0100]  32.1,72.92 90 top
X13  MINI-USB-UX60SC-MB-5STUX60SC-MB-5ST  [UX60SC-MB-5ST]  67.5,63.24 270 top
X14  XULA-CONN  [XULA-DIP40]  54.8,62.02 270 top
X15  MICROSD_CON  [SCHD3A0100]  59.5,19.22 90 top
X16  MINI-USB-UX60SC-MB-5STUX60SC-MB-5ST  [UX60SC-MB-5ST]  67.5,116.94 270 top
X17  XULA-CONN  [XULA-DIP40]  54.8,115.72 270 top
X18  MICROSD_CON  [SCHD3A0100]  59.5,72.92 90 top
X19  MINI-USB-UX60SC-MB-5STUX60SC-MB-5ST  [UX60SC-MB-5ST]  94.9,63.24 270 top
X20  XULA-CONN  [XULA-DIP40]  82.2,62.02 270 top
X21  MICROSD_CON  [SCHD3A0100]  86.9,19.22 90 top
X22  MINI-USB-UX60SC-MB-5STUX60SC-MB-5ST  [UX60SC-MB-5ST]  94.9,116.94 270 top
X23  XULA-CONN  [XULA-DIP40]  82.2,115.72 270 top
X24  MICROSD_CON  [SCHD3A0100]  86.9,72.92 90 top

## Library data of the parts
1.2V 1.2V1-1.2V7 3.3V 3.3V1-3.3V7 5V 5V1-5V7 GND GND1-GND7 SHRT1-SHRT24 U1 U10 U16 U22 U28 U34 U40 U46 X2 X5 X8 X11 X14 X17 X20 X23 = xess
C1 C4 C5 C38-C40 C73-C75 C108-C110 C143-C145 C178-C180 C213-C215 C248-C250 = rcl; DIGIKEY#: 490-3302-1-ND; MANF: Murata; MANF#: GRM188F51A475ZE20J; MOUSER#: 81-GRM188F51A475ZE20
C2 C3 C36 C37 C71 C72 C106 C107 C141 C142 C176 C177 C211 C212 C246 C247 = rcl; DIGIKEY#: 490-1403-1-ND; MANF: Murata; MANF#: GRM1885C1H100JA01D; MOUSER#: 81-GRM39C100D50
C6 C7 C9-C14 C17-C23 C41-C53 C55 C67 C76-C88 C90 C102 C111-C123 C125 C137 C146-C158 C160 C172 C181-C193 C195 C207 C216-C228 C230 C242 C251-C263 C265 C277 = rcl; DIGIKEY#: 445-1317-1-ND; MANF: TDK; MANF#: C1608X7R1C104K; MOUSER#: 810-C1608X7R1C104K
C8 C54 C89 C124 C159 C194 C229 C264 = rcl; DIGIKEY#: 445-5192-1-ND; MANF: TDK; MANF#: C1608X7R1C474K; MOUSER#: 810-C1608X7R1C474K
C15 C16 C25-C34 C57-C65 C68-C70 C92-C100 C103-C105 C127-C135 C138-C140 C162-C170 C173-C175 C197-C205 C208-C210 C232-C240 C243-C245 C267-C275 C278-C280 = rcl; DIGIKEY#: 445-3447-1-ND; MANF: TDK; MANF#: C1005Y5V1H103Z; MOUSER#: 810-C1005Y5V1H103Z
C24 C35 C56 C66 C91 C101 C126 C136 C161 C171 C196 C206 C231 C241 C266 C276 = rcl; DIGIKEY#: 490-1895-1-ND; MANF: Murata; MANF#: GRM32CF51A226ZA01L; MOUSER#: 81-GRM32CF51A226ZA01
JP1-JP8 = pinhead
LED1-LED8 = xess; DIGIKEY#: 160-1834-1-ND; MANF: Lite-On; MANF#: LTST-C194KGKT; MOUSER#: 859-LTST-C194KGKT
Q1-Q8 = xess; DIGIKEY#: 535-10901-1-ND; MANF: Abracon; MANF#: ABM8G-12.000MHZ-4Y-T3; MOUSER#: 815-ABM8G-12-B4Y-T
R1 R3 R5 R13 R15 R20 R22 R27 R29 R34 R36 R41 R43 R48 R50 R55 = rcl; MANF: Xicon; MANF#: 301-5.1K-RC; MOUSER#: 301-5.1K-RC
R2 R14 R21 R28 R35 R42 R49 R56 = xess; DIGIKEY#: 742C083???JPCT-ND; MANF: CTS Resistor Products; MANF#: 742C083???JPTR; MOUSER#: 774-742C083???JP
R4 R6 R16 R23 R30 R37 R44 R51 = xess; DIGIKEY#: 741X163101JPCT-ND; MANF: CTS; MANF#: 741X163101JP; MOUSER#: 774-741X163101JP
R7 R10 R17 R24 R31 R38 R45 R52 = rcl; MANF: Xicon; MANF#: 301-330K-RC; MOUSER#: 301-330K-RC
R8 R11 R18 R25 R32 R39 R46 R53 = rcl; MANF: Xicon; MANF#: 301-680K-RC; MOUSER#: 301-680K-RC
R9 R12 R19 R26 R33 R40 R47 R54 = rcl; MANF: Xicon; MANF#: 301-110-RC; MOUSER#: 301-110-RC
U2 U9 U15 U21 U27 U33 U39 U45 = xess; DIGIKEY#: PIC18F14K50-I/SS-ND; MANF: Microchip; MANF#: PIC18F14K50-I/SS; MOUSER#: 579-PIC18F14K50-I/SS
U3 U11 U17 U23 U29 U35 U41 U47 = xess; MANF: Winbond; MANF#: W9825G6JH-5
U4 U12 U18 U24 U30 U36 U42 U48 = xess; MANF: Winbond
U5 U7 U13 U19 U25 U31 U37 U43 = xess; DIGIKEY#: ZLDO1117G12DICT-ND; MANF: Diodes/Zetex; MANF#: ZLDO1117G12TA; MOUSER#: 522-ZLDO1117G12TA
U6 U8 U14 U20 U26 U32 U38 U44 = xess; DIGIKEY#: ZLDO1117G33DICT-ND; MANF: Diodes/Zetex; MANF#: ZLDO1117G33TA; MOUSER#: 522-ZLDO1117G33TA
X1 X4 X7 X10 X13 X16 X19 X22 = xess; DIGIKEY#: H11589CT-ND; MANF: Hirose; MANF#: UX60SC-MB-5ST; MOUSER#: 798-UX60SC-MB-5ST
X3 X6 X9 X12 X15 X18 X21 X24 = xess; MANF: ALPS; MANF#: SCHD3A0100; MOUSER#: 688-SCHD3A0100